# EAGLE board Copy of  8x8 LED Matrix for all dimensions . (EAGLE 7.6.0)

Size 73.58 x 63.39 mm. Coordinates in mm from the lower left corner, seen from the top.
Outline: 0,0 56.82,0 56.82,53.33 0,53.33 0,0
Copper layers (1*16): Top 0.035mm / dielectric 1.5mm / Bottom 0.035mm
Design rules "default": minimum track width 10mil, minimum drill 24mil, track to track 8mil, track to pad 8mil, pad to pad 8mil, via to via 8mil, smd to smd 8mil, copper to edge 40mil, drill to drill 8mil, minimum pad ring 10mil, minimum via ring 8mil, stop-mask expansion 4mil, vias tented up to drill 0mil, thermal gap 10mil

## Footprints (pad centres in the part's own frame; a part is rotated, then mirrored left to right if it is on the bottom)
LED-RGB-THRU = drill 0.762 pad 0.889 long: 1 1.905,0; 2 0.635,0; 3 -0.635,0; 4 -1.905,0
0207/10 = drill 0.813 octagon: 1 -5.08,0; 2 5.08,0
B25V = drill 0.813 long: A 2.54,0.635; E -2.54,0.635; S 0,0.635
ARDUINO_UNO = drill 1.016 pad 1.88: 0 63.5,50.8; 1 60.96,50.8; 2 58.42,50.8; 3 55.88,50.8; 3.3V 35.56,2.54; 4 53.34,50.8; 5 50.8,50.8; 5V 38.1,2.54; 6 48.26,50.8; 7 45.72,50.8; 8 41.656,50.8; 9 39.116,50.8; 10 36.576,50.8; 11 34.036,50.8; 12 31.496,50.8; 13 28.956,50.8; A0 50.8,2.54; A1 53.34,2.54; A2 55.88,2.54; A3 58.42,2.54; A4 60.96,2.54; A5 63.5,2.54; AREF 23.876,50.8; GND 26.416,50.8; GND. 43.18,2.54; GND.. 40.64,2.54; I/OREF 30.48,2.54; N/C 27.94,2.54; RESET 33.02,2.54; SCL 18.796,50.8; SDA 21.336,50.8; VIN 45.72,2.54 | hole 3.2: 66.04,7.62; 66.04,35.56; 15.24,50.8; 13.97,2.54
DIL16 = drill 0.813 long: 1 -8.89,-3.81; 2 -6.35,-3.81; 3 -3.81,-3.81; 4 -1.27,-3.81; 5 1.27,-3.81; 6 3.81,-3.81; 7 6.35,-3.81; 8 8.89,-3.81; 9 8.89,3.81; 10 6.35,3.81; 11 3.81,3.81; 12 1.27,3.81; 13 -1.27,3.81; 14 -3.81,3.81; 15 -6.35,3.81; 16 -8.89,3.81

## Placement (x,y rotation side)
D1  [LED-RGB-THRU]  5,175.18 0 top  (outside the outline)
D2  [LED-RGB-THRU]  5,225.98 0 top  (outside the outline)
D3  [LED-RGB-THRU]  5,149.78 0 top  (outside the outline)
D4  [LED-RGB-THRU]  5,238.68 0 top  (outside the outline)
D5  [LED-RGB-THRU]  5,251.38 0 top  (outside the outline)
D6  [LED-RGB-THRU]  5,213.28 0 top  (outside the outline)
D7  [LED-RGB-THRU]  5,200.58 0 top  (outside the outline)
D8  [LED-RGB-THRU]  5,187.88 0 top  (outside the outline)
D9  [LED-RGB-THRU]  5,937.18 0 top  (outside the outline)
D10  [LED-RGB-THRU]  5,264.08 0 top  (outside the outline)
D11  [LED-RGB-THRU]  5,962.58 0 top  (outside the outline)
D12  [LED-RGB-THRU]  5,276.78 0 top  (outside the outline)
D13  [LED-RGB-THRU]  5,289.48 0 top  (outside the outline)
D14  [LED-RGB-THRU]  5,302.18 0 top  (outside the outline)
D15  [LED-RGB-THRU]  5,314.88 0 top  (outside the outline)
D19  [LED-RGB-THRU]  5,530.78 0 top  (outside the outline)
D27  [LED-RGB-THRU]  5,543.48 0 top  (outside the outline)
D46  [LED-RGB-THRU]  5,162.48 0 top  (outside the outline)
D54  [LED-RGB-THRU]  5,327.58 0 top  (outside the outline)
D55  [LED-RGB-THRU]  5,340.28 0 top  (outside the outline)
D56  [LED-RGB-THRU]  5,352.98 0 top  (outside the outline)
D57  [LED-RGB-THRU]  5,365.68 0 top  (outside the outline)
D58  [LED-RGB-THRU]  5,378.38 0 top  (outside the outline)
D59  [LED-RGB-THRU]  5,391.08 0 top  (outside the outline)
D60  [LED-RGB-THRU]  5,403.78 0 top  (outside the outline)
D61  [LED-RGB-THRU]  5,416.48 0 top  (outside the outline)
D62  [LED-RGB-THRU]  5,429.18 0 top  (outside the outline)
D63  [LED-RGB-THRU]  5,441.88 0 top  (outside the outline)
D64  [LED-RGB-THRU]  5,454.58 0 top  (outside the outline)
D65  [LED-RGB-THRU]  5,467.28 0 top  (outside the outline)
D66  [LED-RGB-THRU]  5,479.98 0 top  (outside the outline)
D67  [LED-RGB-THRU]  5,492.68 0 top  (outside the outline)
D68  [LED-RGB-THRU]  5,505.38 0 top  (outside the outline)
D69  [LED-RGB-THRU]  5,518.08 0 top  (outside the outline)
D70  [LED-RGB-THRU]  5,556.18 0 top  (outside the outline)
D71  [LED-RGB-THRU]  5,568.88 0 top  (outside the outline)
D72  [LED-RGB-THRU]  5,581.58 0 top  (outside the outline)
D73  [LED-RGB-THRU]  5,594.28 0 top  (outside the outline)
D74  [LED-RGB-THRU]  5,606.98 0 top  (outside the outline)
D75  [LED-RGB-THRU]  5,619.68 0 top  (outside the outline)
D76  [LED-RGB-THRU]  5,632.38 0 top  (outside the outline)
D77  [LED-RGB-THRU]  5,645.08 0 top  (outside the outline)
D78  [LED-RGB-THRU]  5,657.78 0 top  (outside the outline)
D79  [LED-RGB-THRU]  5,670.48 0 top  (outside the outline)
D80  [LED-RGB-THRU]  5,683.18 0 top  (outside the outline)
D81  [LED-RGB-THRU]  5,695.88 0 top  (outside the outline)
D82  [LED-RGB-THRU]  5,708.58 0 top  (outside the outline)
D83  [LED-RGB-THRU]  5,721.28 0 top  (outside the outline)
D84  [LED-RGB-THRU]  5,733.98 0 top  (outside the outline)
D85  [LED-RGB-THRU]  5,746.68 0 top  (outside the outline)
D86  [LED-RGB-THRU]  5,759.38 0 top  (outside the outline)
D87  [LED-RGB-THRU]  5,772.08 0 top  (outside the outline)
D88  [LED-RGB-THRU]  5,784.78 0 top  (outside the outline)
D89  [LED-RGB-THRU]  5,797.48 0 top  (outside the outline)
D90  [LED-RGB-THRU]  5,810.18 0 top  (outside the outline)
D91  [LED-RGB-THRU]  5,822.88 0 top  (outside the outline)
D92  [LED-RGB-THRU]  5,835.58 0 top  (outside the outline)
D93  [LED-RGB-THRU]  5,848.28 0 top  (outside the outline)
D94  [LED-RGB-THRU]  5,860.98 0 top  (outside the outline)
D95  [LED-RGB-THRU]  5,873.68 0 top  (outside the outline)
D96  [LED-RGB-THRU]  5,886.38 0 top  (outside the outline)
D97  [LED-RGB-THRU]  5,899.08 0 top  (outside the outline)
D98  [LED-RGB-THRU]  5,911.78 0 top  (outside the outline)
D99  [LED-RGB-THRU]  5,924.48 0 top  (outside the outline)
R1  220‎Ω  [0207/10]  5,48.18 0 top
R2  220‎Ω  [0207/10]  5,60.88 0 top
R3  220‎Ω  [0207/10]  5,73.58 0 top  (outside the outline)
R4  220‎Ω  [0207/10]  5,86.28 0 top  (outside the outline)
R5  220‎Ω  [0207/10]  5,98.98 0 top  (outside the outline)
R6  220‎Ω  [0207/10]  5,111.68 0 top  (outside the outline)
R7  220‎Ω  [0207/10]  5,124.38 0 top  (outside the outline)
R8  220‎Ω  [0207/10]  5,137.08 0 top  (outside the outline)
Rpot1  250k‎Ω  [B25V]  5,949.88 0 top  (outside the outline)
U1  [ARDUINO_UNO]  5,10.08 0 top
U2  [DIL16]  5,22.78 0 top
U4  [DIL16]  5,35.48 0 top

## Library data of the parts
D1-D15 D19 D27 D46 D54-D99 R1-R8 Rpot1 U1 U2 U4 = AUTODESK_CIRCUITS_BREADBOARD

## Nets
N$1: U1.3 U2.12 U4.12
N$2: U1.2 U2.14
N$3: U2.9 U4.14
N$4: U1.4 U2.11 U4.11
N$5: R2.2 U4.1
N$6: R5.2 U4.4
N$7: R7.2 U4.6
N$8: R8.2 U4.7
N$9: R6.2 U4.5
N$10: R4.2 U4.3
N$11: U4.9
N$12: Rpot1.E U1.5V U2.10 U2.16 U4.10 U4.16
N$13: R1.2 U4.15
N$14: R3.2 U4.2
N$15: D1.3 D13.3 D56.3 D67.3 D70.3 D81.3 D86.3 D97.3 R6.1
N$16: D8.3 D12.3 D57.3 D66.3 D71.3 D80.3 D87.3 D96.3 R5.1
N$17: D14.3 D27.3 D46.3 D55.3 D68.3 D82.3 D85.3 D98.3 R7.1
N$18: D3.3 D15.3 D19.3 D54.3 D69.3 D83.3 D84.3 D99.3 R8.1
N$19: D7.3 D10.3 D58.3 D65.3 D72.3 D79.3 D88.3 D95.3 R4.1
N$20: D6.3 D11.3 D59.3 D64.3 D73.3 D78.3 D89.3 D94.3 R3.1
N$21: D2.3 D5.3 D60.3 D63.3 D74.3 D77.3 D90.3 D93.3 R2.1
N$22: D1.2 D2.2 D3.2 D6.2 D7.2 D8.2 D9.2 D46.2 U2.15
N$23: D4.2 D5.2 D10.2 D11.2 D12.2 D13.2 D14.2 D15.2 U2.1
N$24: D4.3 D9.3 D61.3 D62.3 D75.3 D76.3 D91.3 D92.3 R1.1
N$25: D54.2 D55.2 D56.2 D57.2 D58.2 D59.2 D60.2 D61.2 U2.2
N$26: D62.2 D63.2 D64.2 D65.2 D66.2 D67.2 D68.2 D69.2 U2.3
N$27: D19.2 D27.2 D70.2 D71.2 D72.2 D73.2 D74.2 D75.2 U2.4
N$28: D76.2 D77.2 D78.2 D79.2 D80.2 D81.2 D82.2 D83.2 U2.5
N$29: D84.2 D85.2 D86.2 D87.2 D88.2 D89.2 D90.2 D91.2 U2.6
N$30: D92.2 D93.2 D94.2 D95.2 D96.2 D97.2 D98.2 D99.2 U2.7
N$31: Rpot1.A U1.GND.. U2.8 U2.13 U4.8 U4.13
N$32: Rpot1.S U1.A0

## Tracks (layer width: path | path; a pad name or v marks a point on that pad's centre or on a via)
N$1  (2 unrouted)
N$2  (1 unrouted)
N$3  (1 unrouted)
N$4  (2 unrouted)
N$5  (1 unrouted)
N$6  (1 unrouted)
N$7  (1 unrouted)
N$8  (1 unrouted)
N$9  (1 unrouted)
N$10  (1 unrouted)
N$12  (5 unrouted)
N$13  (1 unrouted)
N$14  (1 unrouted)
N$15  (8 unrouted)
N$16  (8 unrouted)
N$17  (8 unrouted)
N$18  (8 unrouted)
N$19  (8 unrouted)
N$20  (8 unrouted)
N$21  (8 unrouted)
N$22  (8 unrouted)
N$23  (8 unrouted)
N$24  (8 unrouted)
N$25  (8 unrouted)
N$26  (8 unrouted)
N$27  (8 unrouted)
N$28  (8 unrouted)
N$29  (8 unrouted)
N$30  (8 unrouted)
N$31  (5 unrouted)
N$32  (1 unrouted)